# Altium PCB PCB1.PcbDoc
Units mil, origin at the board's own origin, x right, y up, seen from the top; angles counter-clockwise.
Board outline 2372.23 x 1584.83 mil, 2 copper layers (Top Layer, Bottom Layer); 37 components, 27 nets, 141 pads, 30 vias.
Unrouted connection lines stored in the file: 20.
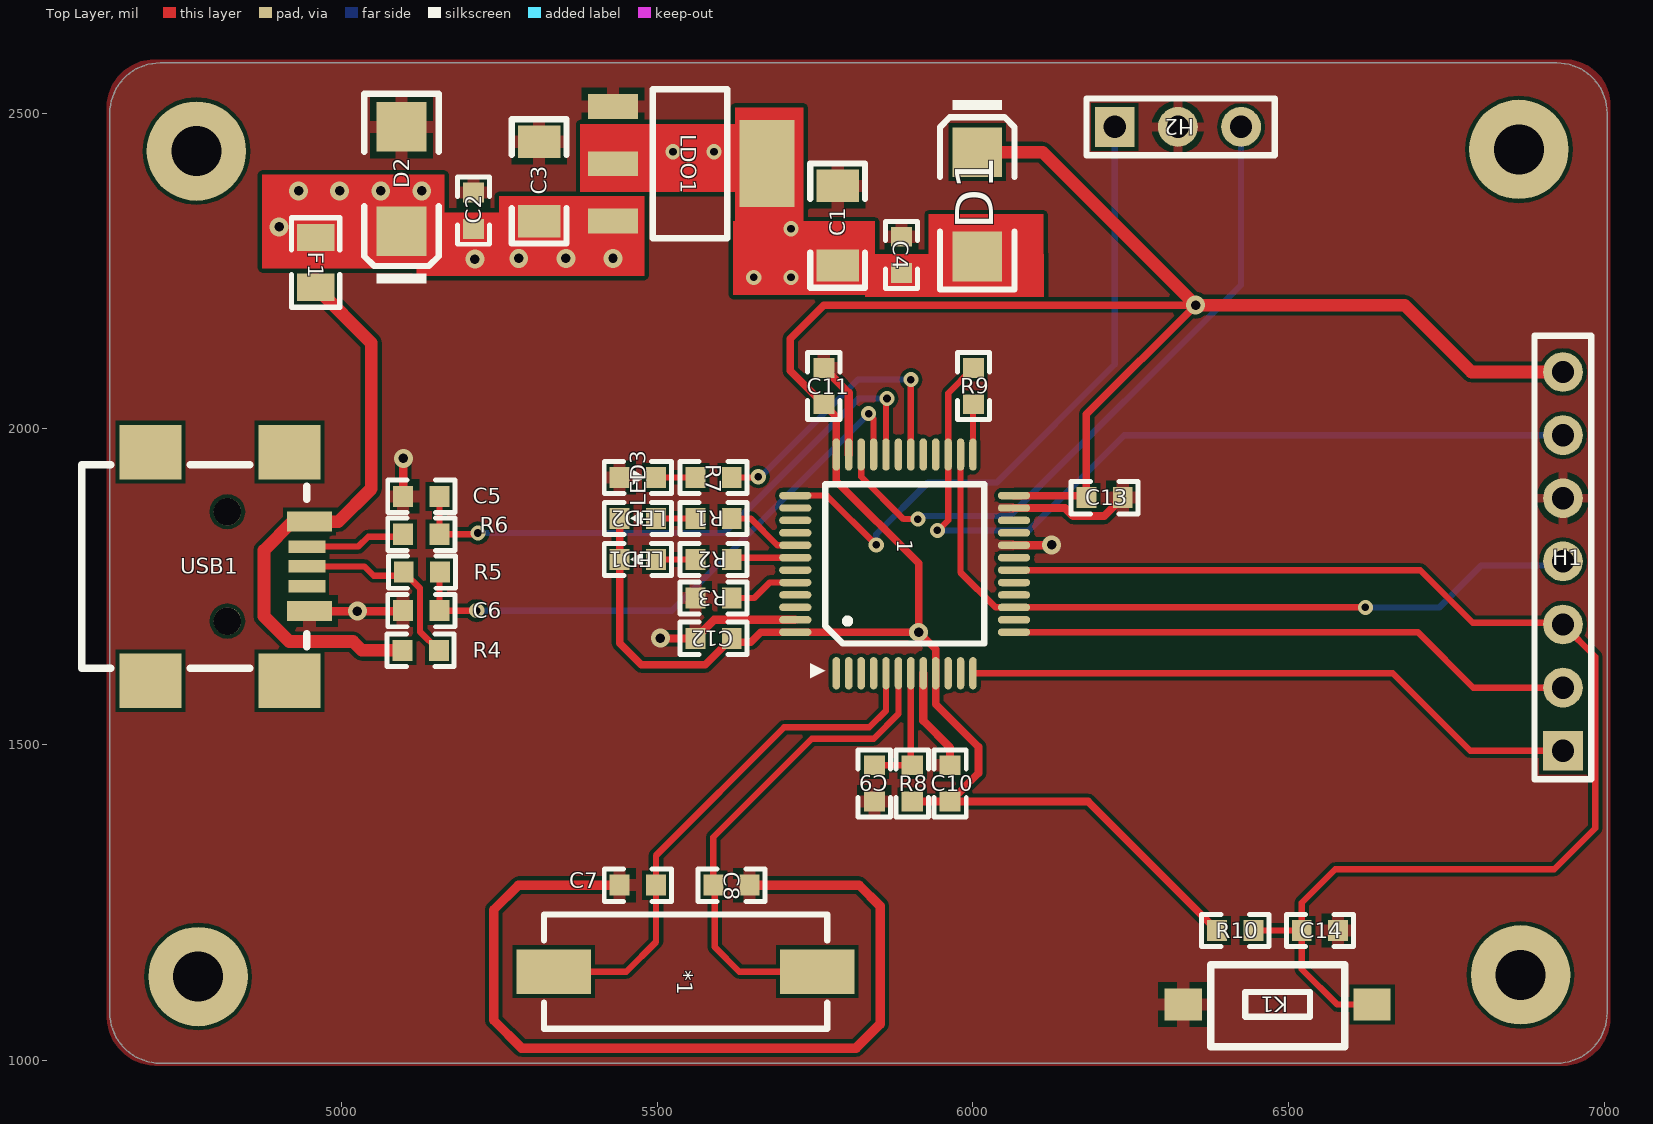
[diagram p0: Top Layer view]
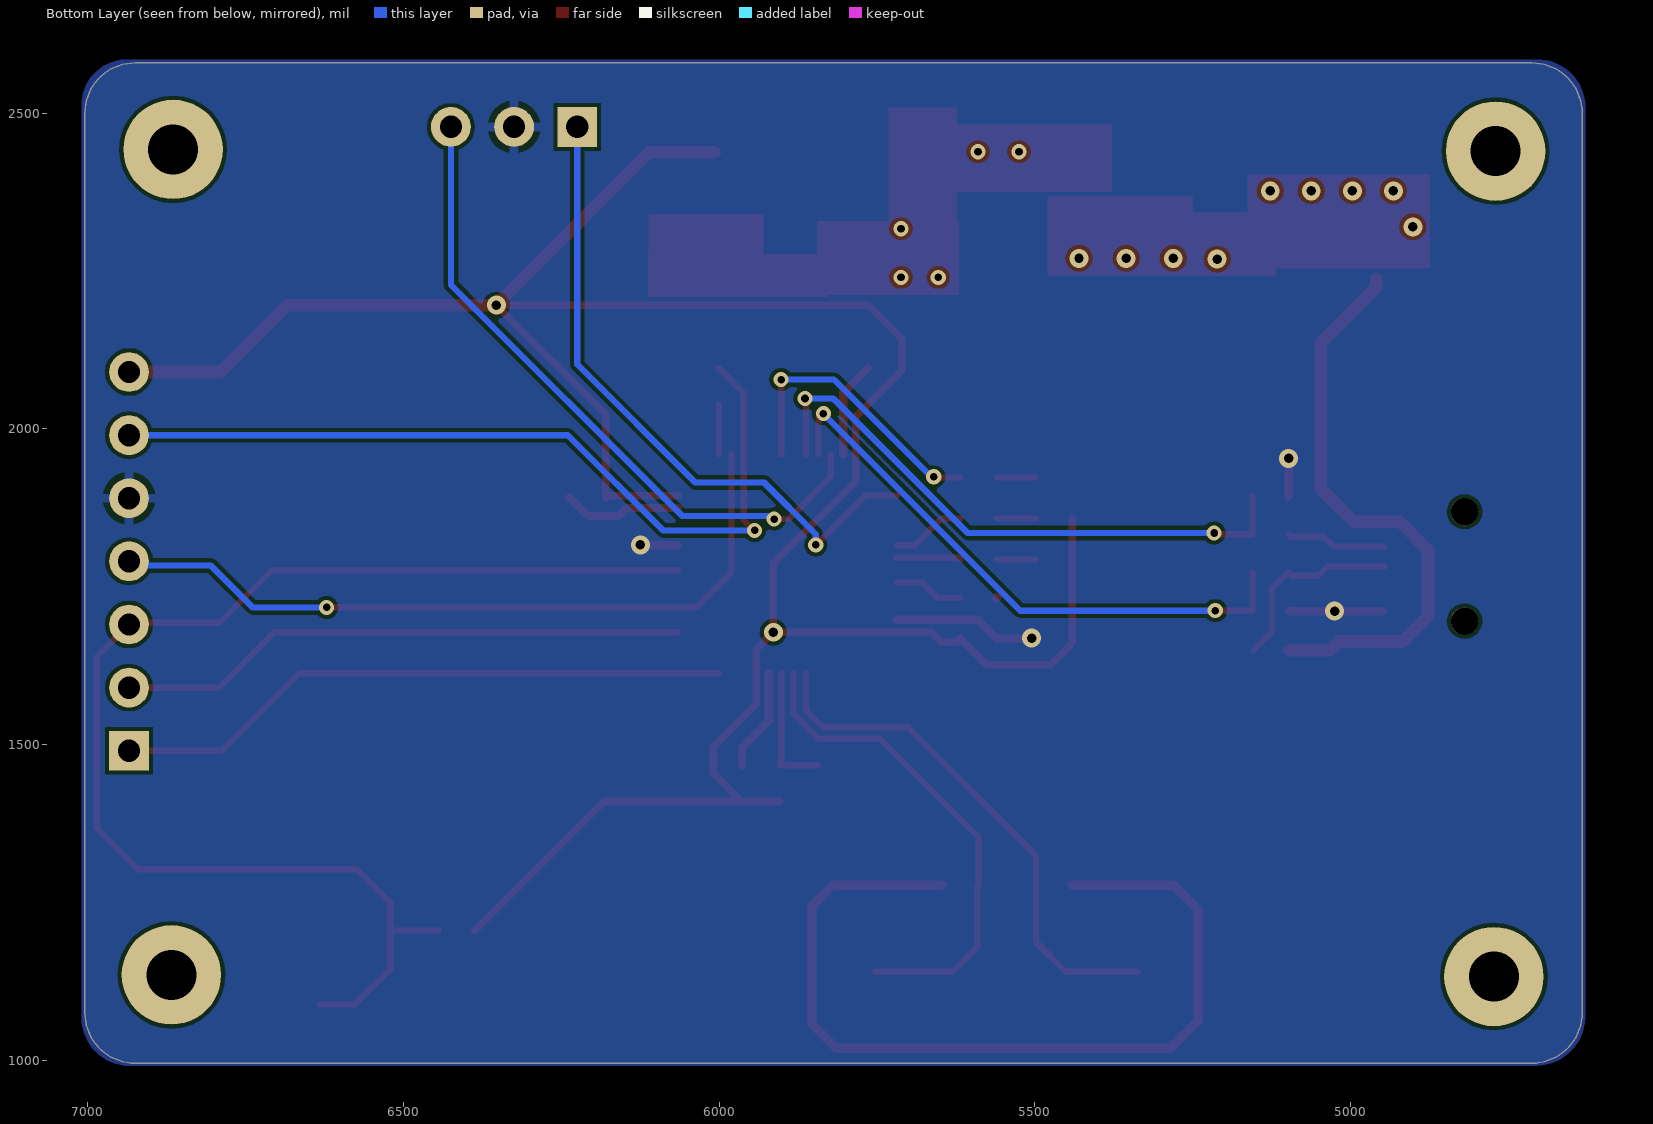
[diagram p1: Bottom Layer view, seen from below]
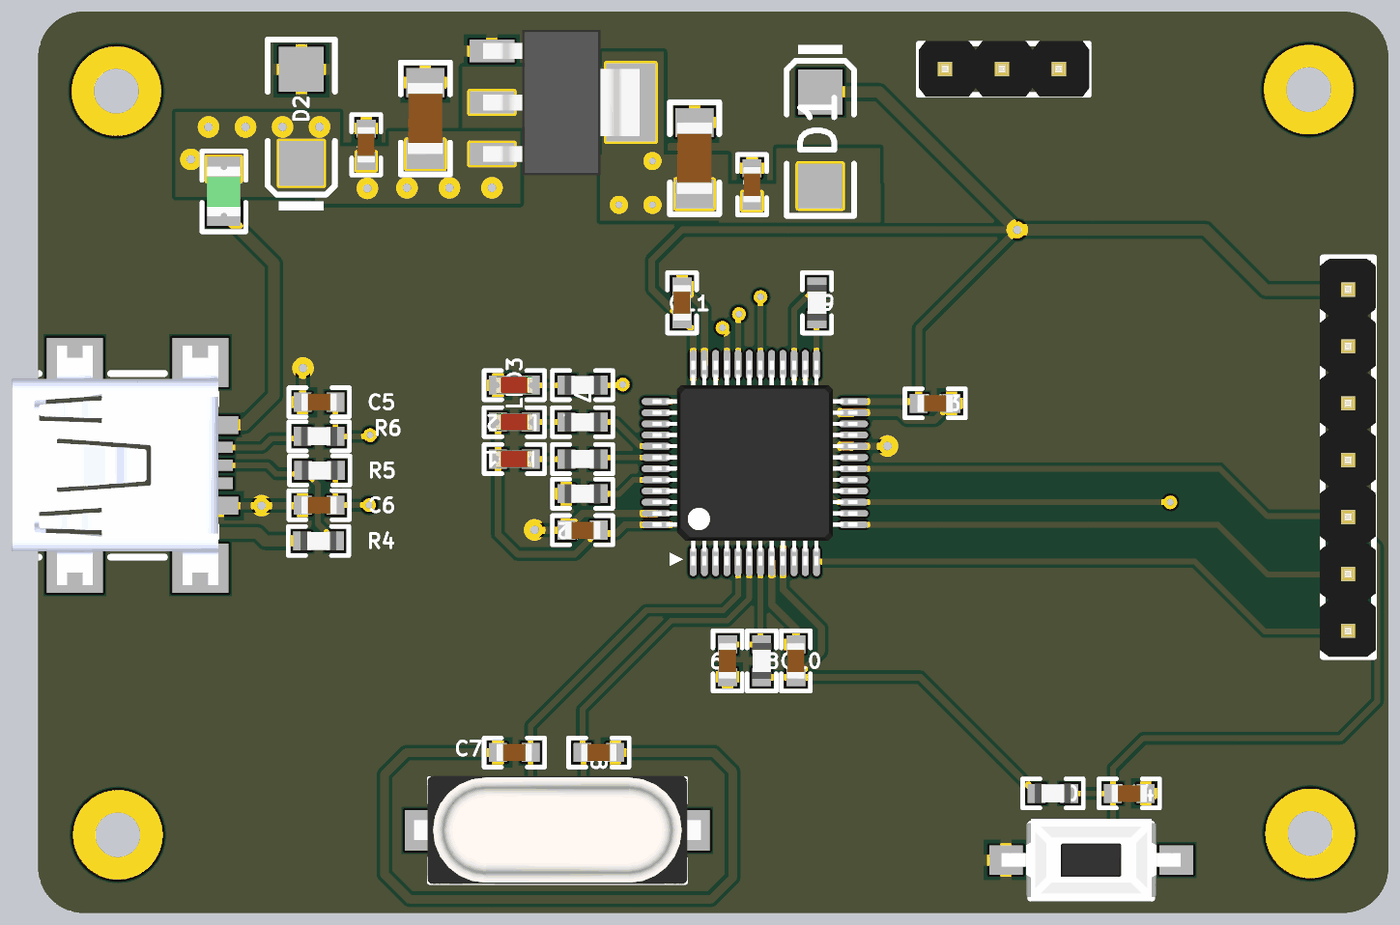
[diagram p2: 3D render of the assembled board from above, using the file's embedded part models]

## Layer stack, top to bottom
Top Solder: solder mask 0.4, Solder Resist, Dk 3.5
Top Layer: signal copper 1.4
Dielectric 1: dielectric 12.6, FR-4, Dk 4.8
Bottom Layer: signal copper 1.4
Bottom Solder: solder mask 0.4, Solder Resist, Dk 3.5

## Board outline
4632.78,1074.8 ccw(c4712.6,1074.8) 4712.6,994.99 6925.2,994.99 ccw(c6925.2,1074.8) 7005.02,1074.8 7005.02,2500 ccw(c6925.2,2500) 6925.2,2579.82 4712.6,2579.82 ccw(c4712.6,2500) 4632.78,2500

## Design rules (kind name [scope] priority, off if disabled: settings)
Clearance [All] p1: gap=6 ignorepadtopadclearanceinfootprint=TRUE
PlaneClearance [All] p1: clearance=8
PlaneConnect [All] p1: planeconnectstyle=Relief reliefexpansion=10 reliefentries=4 reliefconductorwidth=6 reliefairgap=8
PolygonConnect [All] p1: thpad.connectstyle=Relief thpad.reliefconductorwidth=15 thpad.reliefentries=4 thpad.polygonreliefangle="90 Angle" thpad.airgapwidth=10 smdpad.connectstyle=Relief smdpad.reliefconductorwidth=20 smdpad.reliefentries=4 smdpad.polygonreliefangle="90 Angle" smdpad.airgapwidth=10 via.connectstyle=Direct via.reliefconductorwidth=10 via.reliefentries=4 via.polygonreliefangle="90 Angle" via.airgapwidth=10
RoutingVias POWER_Vias [InNetClass('POWER')] p1: holewidth=15 width=30 viastyle="Through Hole" minholewidth=15 minwidth=30 maxholewidth=50 maxwidth=100
RoutingVias PIN_Vias [All] p2: holewidth=12 width=24 viastyle="Through Hole" minholewidth=12 minwidth=24 maxholewidth=12 maxwidth=24
SolderMaskExpansion [All] p1: expansion=4
UnRoutedNet [All] p1: checkbadconnections=TRUE
Width PIN_Width [InNetClass('PIN')] p1: maxlimit=10 minlimit=6 preferedwidth=6
Width POWER_Width [InNetClass('POWER')] p2: maxlimit=80 minlimit=12 preferedwidth=15
27 further rules are at their usual default settings.

## Classes and differential pairs
net class USB: USB_D+ USB_D-
net class POWER: 3V3 GND NetC2_2 VCC
net class PIN: Net1_25 Net1_30 Net1_32 Net1_33 Net1_41 Net1_42 Net1_44 NetLED1_2 NetLED2_2 NetLED3_1 NSRT OSC_IN OSC_OUT SWCLK SWDIO TGT_NREST TGT_RX TGT_SWCLK TGT_SWDIO TGT_TX USB_D+ USB_D-

## Components (designator, comment, footprint, x,y, rotation, side; value= is the part's Value field where it differs from the comment)
1 "STM32F103CBT6" LQFP_48_7X7 5892,1786 r0 top
*1 "8M" XTAL_SMD_49S 5545,1140 r180 top
C1 "106" C_SOP_1206 5786,2321.87 r270 top
C2 "104" C_SOP_0603 5209,2345.54 r270 top
C3 "106" C_SOP_1206 5313,2391.87 r270 top
C4 "104" C_SOP_0603 5887,2275.54 r270 top
C5 "18pf" C_SOP_0603 5126.26,1893 r0 top
C6 "18pf" C_SOP_0603 5126.26,1712 r0 top
C7 "22pf" C_SOP_0603 5469.26,1277 r0 top
C8 "22pf" C_SOP_0603 5617.74,1277 r180 top
C9 "104" C_SOP_0603 5844,1438.26 r270 top
C10 "104" C_SOP_0603 5964,1438.26 r270 top
C11 "104" C_SOP_0603 5764,2067.74 r270 top
C12 "104" C_SOP_0603 5589.26,1668 r0 top
C13 "104" C_SOP_0603 6208.74,1891 r180 top
C14 "104" C_SOP_0603 6549.91,1205.13 r0 top
D1 "1N4007" LC-SMA(DO-214AC)_S5 6007,2355.68 r270 top
D2 "1N4007" LC-SMA(DO-214AC)_S5 5095,2395.68 r90 top
F1 "6V/1A" Fuse_0805 4959,2263.65 r90 top
H1 "Header 7H" "Header 2.54X7" 6935,1790 r90 top
H2 "Header_1*3" "Header 2.54X3" 6325,2478.35 r0 top
K1 "KEY" SW_PB_3X6 6483,1088 r180 top
LDO1 "LDO-3.3-AMS1117" SOT223_3 5552,2420 r180 top
LED1 "LED" LED_0603_R 5469.26,1793 r0 top
LED2 "LED" LED_0603_R 5469.26,1858 r0 top
LED3 "LED" LED_0603_R 5469.26,1923 r180 top
R1 "1K" R_SMD_0603 5589.26,1858 r180 top
R2 "1K" R_SMD_0603 5589.26,1793 r180 top
R3 "100K" R_SMD_0603 5589.26,1732 r180 top
R4 "10K" R_SMD_0603 5125.26,1649 r0 top
R5 "33R" R_SMD_0603 5127.26,1773 r180 top
R6 "33R" R_SMD_0603 5126.26,1833 r180 top
R7 "470R" R_SMD_0603 5589.26,1923 r180 top
R8 "100K" R_SMD_0603 5904,1438.26 r270 top
R9 "100R" R_SMD_0603 6001,2067.74 r90 top
R10 "10K" R_SMD_0603 6415.74,1205.13 r180 top
USB1 "USB_AB" USB_MINI_SMD 4823,1782 r180 top

## Footprints (in the part's own frame and the unit in brackets; to place one, negate y for a bottom-side part, rotate by r counter-clockwise, add the part's x,y. Pads: shape width x height; smd on the part's side, far side on the other; paste and mask are expansions set on the pad)
C_SOP_0603 [mm]
  rect 0.8x0.85 smd: 1(-0.73,0) 2(0.73,0)
  silkscreen extent -1.35,-0.65 1.35,0.65, body extent -0.8,-0.4 0.8,0.4, height 0.6
C_SOP_1206 [mm]
  rect 1.3x1.7 smd: 1(-1.6,0) 2(1.6,0)
  silkscreen extent -2.5,-1.1 2.5,1.1, body extent -1.6,-0.8 1.6,0.8, height 0.95
Fuse_0805 [mm]
  rect 1.1x1.5 smd: 1(-1,0) 2(1,0)
  silkscreen extent -1.8,-0.98 1.8,0.98, body extent -1.1,-0.75 1.1,0.75, height 1.24
"Header 2.54X3" [mm]
  rect 1.6x1.6 hole 0.9: 1(-2.54,0)
  round 1.6 hole 0.9: 2(0,0) 3(2.54,0)
  silkscreen extent -3.68,-1.14 3.9,1.14, body extent -3.68,-1.23 3.94,1.27, height 8.3
"Header 2.54X7" [mm]
  rect 1.6x1.6 hole 0.9: 1(-7.62,0)
  round 1.6 hole 0.9: 2(-5.08,0) 3(-2.54,0) 4(0,0) 5(2.54,0) 6(5.08,0) 7(7.62,0)
  silkscreen extent -8.76,-1.14 9.08,1.14, body extent -8.76,-1.23 9.02,1.27, height 8.3
LC-SMA(DO-214AC)_S5 [mm]
  rect 2x2 smd: 1(2.1,0) 2(-2.1,0)
  silkscreen extent -4.2,-1.5 3.43,1.5
LED_0603_R [mm]
  rect 0.8x0.85 smd: 1(-0.73,0) 2(0.73,0)
  silkscreen extent -1.35,-0.65 1.35,0.65, body extent -0.81,-0.4 0.81,0.4, height 0.6
LQFP_48_7X7 [mm]
  oval 0.3x1.3 smd: 1(-2.75,-4.4) 2(-2.25,-4.4) 3(-1.75,-4.4) 4(-1.25,-4.4) 5(-0.75,-4.4) 6(-0.25,-4.4) 7(0.25,-4.4) 8(0.75,-4.4) 9(1.25,-4.4) 10(1.75,-4.4) 11(2.25,-4.4) 12(2.75,-4.4) 25(2.75,4.4) 26(2.25,4.4) 27(1.75,4.4) 28(1.25,4.4) 29(0.75,4.4) 30(0.25,4.4) 31(-0.25,4.4) 32(-0.75,4.4) 33(-1.25,4.4) 34(-1.75,4.4) 35(-2.25,4.4) 36(-2.75,4.4)
  oval 1.3x0.3 smd: 13(4.4,-2.75) 14(4.4,-2.25) 15(4.4,-1.75) 16(4.4,-1.25) 17(4.4,-0.75) 18(4.4,-0.25) 19(4.4,0.25) 20(4.4,0.75) 21(4.4,1.25) 22(4.4,1.75) 23(4.4,2.25) 24(4.4,2.75) 37(-4.4,2.75) 38(-4.4,2.25) 39(-4.4,1.75) 40(-4.4,1.25) 41(-4.4,0.75) 42(-4.4,0.25) 43(-4.4,-0.25) 44(-4.4,-0.75) 45(-4.4,-1.25) 46(-4.4,-1.75) 47(-4.4,-2.25) 48(-4.4,-2.75)
  silkscreen extent -3.8,-4.6 3.2,3.2, body extent -4.57,-4.57 4.57,4.57, height 1.62
R_SMD_0603 [mm]
  rect 0.8x0.85 smd: 1(-0.73,0) 2(0.73,0)
  silkscreen extent -1.35,-0.65 1.35,0.65, body extent -0.8,-0.43 0.8,0.43, height 0.48
SOT223_3 [mm]
  rect 2x1 smd: 1(3.1,-2.3) 2(3.1,0) 3(3.1,2.3)
  rect 2.2x3.5 smd: 4(-3.1,0)
  silkscreen extent -1.5,-3 1.5,3, body extent -3.5,-3.25 3.5,3.25, height 1.64
SW_PB_3X6 [mm]
  rect 1.5x1.3 smd: 1(-3.8,0) 2(3.8,0)
  silkscreen extent -2.7,-1.6 2.7,1.7, body extent -4,-1.85 4,1.85, height 2.6
USB_MINI_SMD [mm]
  rect 1.8x0.8 smd: 1(-3.2,-1.8) 5(-3.2,1.8)
  rect 1.5x0.5 smd: 2(-3.1,-0.8) 3(-3.1,0) 4(-3.1,0.8)
  round 1.1 hole 1.1 unplated: H1(0.1,2.2) H2(0.1,-2.2)
  rect 2.5x2.2 smd: H3(-2.4,-4.6) H4(-2.4,4.6) H5(3.2,-4.6) H6(3.2,4.6)
  silkscreen extent -3.1,-4.1 5.97,4.1, body extent -3.2,-5.35 6,5.35, height 3.95
XTAL_SMD_49S [mm]
  rect 3x1.8 smd: 1(-5.3,0) 2(5.3,0)
  silkscreen extent -5.7,-2.3 5.7,2.3, body extent -6.4,-2.43 6.4,2.4, height 4.4

## Part data
*1: library part XTAL_SMD
C1 C2 C3 C4 C5 C6 C7 C8 C9 C10 C11 C12 C13 C14: library part C_SMD
F1: library part FUSE
H1: "Header, 7-Pin, Right Angle", LatestRevisionDate=17-Jul-2002, LatestRevisionNote="Re-released for DXP Platform.", Publisher="Altium Limited"
R1 R2 R3 R4 R5 R6 R7 R8 R9 R10: library part R_SMD

## Free pads (board coordinates)
  round 157.48 hole 78.74: ""(4770,2440) ""(4772.6,1132.2) ""(6865.2,2442.6) ""(6867.8,1134.8)

## Via types
v1: diameter 30, hole 15, Top Layer to Bottom Layer, 15 vias
v2: diameter 24, hole 12, Top Layer to Bottom Layer, 15 vias

## Nets (pads, with @x,y where several pads share a name; then routed paths per layer and width w, separated by ;. In a path a pad name is that pad's centre, name@x,y a point inside that pad or via, vN(x,y) a via of type N, cw(c..) or ccw(c..) an arc to the next point about the centre after c; other vN are vias at no path point)
3V3: 1.9 1.24 1.36 1.48 C10.2 C11.2 C12.2 C13.2 D1.2 H1.7 LED1.1 LED2.1 R8.2 R10.2 | length 4384.2
  Top Layer w12: LED2.1 LED1.1 5440.52,1660.48 5475,1626 5576,1626 C12.2 5624,1662 5648,1662 5663.73,1677.73 1.48 v1(5914.27,1677.73) ; R8.2 C10.2 ; 1.24 6176.73,1894.27 C13.2 6180,2023 v1(6353,2196) 5764,2196 5711,2143 5711,2092 C11.2 5783.73,2019.27 1.36 5783.73,1917.27 5914.27,1786.73 v1(5914.27,1677.73) ; R10.2 6182.61,1409.52 C10.2 ; v1(5914.27,1677.73) 5941.21,1650.79 1.9 5941.21,1563.79 6009,1496 6009,1454.52 C10.2
  Top Layer w20: D1.2 6110.65,2438.35 v1(6353,2196) 6684,2196 6790,2090 H1.7
GND: 1.8 1.20 1.23 1.35 1.47 C1.1 C2.1 C3.1 C4.1 C5.1 C6.1 C7.1 C8.1 C9.2 C10.1 C11.1 C12.1 C13.1 C14.2 D2.1 H1.5 H2.2 K1.2 LDO1.1 LED3.2 R3.2 USB1.5 | length 2445.6
  Top Layer w13: USB1.5 v1(5025,1711.13) 5096.65,1711.13 C6.1 ; C5.1 5097.52,1952.52 v1(5098,1953) ; v1(5505,1668.44) 5505.44,1668 C12.1 5589.94,1697.42 1.47 ; C11.1 5803.42,2057.06 1.35 ; 1.8 5921.53,1537.47 5964,1495 C10.1 ; 1.20 6124.53,1815.53 v1(6125,1816) ; 1.23 6146.26,1874.58 6159.07,1861.77 6208.25,1861.77 C13.1
  Top Layer w15: C7.1 5280,1277 5241,1238 5241,1063 5285,1019 5815,1019 5853,1057 5853,1244 5820,1277 C8.1
Net1_25: 1.25 R9.1 | length 80.1
  Top Layer w10: 1.25 6000.27,2038.27 R9.1
Net1_30: 1.30 R7.1 | length 467
  Top Layer w10: R7.1 5659,1923 v2(5660,1924) ; 1.30 5901.84,2077.84 v2(5902,2078)
  Bottom Layer w10: v2(5660,1924) 5664,1924 5818,2078 v2(5902,2078)
Net1_32: 1.32 C5.2 R6.1 | length 947.5
  Top Layer w10: C5.2 R6.1 5214,1833 v2(5216,1835) ; 1.32 5862.47,2046.47 v2(5864,2048)
  Bottom Layer w10: v2(5216,1835) 5606,1835 5819,2048 v2(5864,2048)
Net1_33: 1.33 C6.2 R5.1 | length 938.6
  Top Layer w10: R5.1 5155,1772 C6.2 v2(5214,1712) ; v2(5835,2024) 5842.79,2016.21 1.33
  Bottom Layer w10: v2(5214,1712) 5523,1712 v2(5835,2024)
Net1_41: 1.41 R1.1 | length 118.4
  Top Layer w10: R1.1 5648,1858 5690.47,1815.53 1.41
Net1_42: 1.42 R2.1 | length 101.9
  Top Layer w10: R2.1 5620.84,1795.84 1.42
Net1_44: 1.44 R3.1 | length 110.9
  Top Layer w10: R3.1 5654,1732 5678.47,1756.47 1.44
NetC1_2: C1.2 C4.2 D1.1 LDO1.2 LDO1.4 | length 2.8
  Top Layer w20: v2@5587.94,2439 v2@5589.94,2437
  other v2: 5653,2240 5712,2240 5712,2317 5525,2439 5589.94,2439
NetC2_2: C2.2 C3.2 D2.2 F1.2 LDO1.3 | length 26.6
  Top Layer w12: v1@4926,2371 4926,2370 v1@4932,2364 ; C3.2@5300.91,2316.8 C3.2
  other v1: 5211,2269 5280.65,2270 5355.3,2270 5429.95,2270 4901,2320 4932,2377 4997,2377 5062,2377 5127,2377
NetLED1_2: LED1.2 R2.2 | length 62.5
  Top Layer w10: LED1.2 R2.2
NetLED2_2: LED2.2 R1.2 | length 62.5
  Top Layer w10: LED2.2 R1.2
NetLED3_1: LED3.1 R7.2 | length 62.5
  Top Layer w10: LED3.1 R7.2
NSRT: 1.7 C9.1 R8.1 | length 206.7
  Top Layer w10: C9.1 R8.1 5901.84,1469.16 1.7
OSC_IN: 1.5 *1.2 C7.2 | length 837
  Top Layer w10: *1.2 5451,1140 5498,1187 C7.2 5498,1324 5701,1527 5836,1527 5862.47,1553.47 1.5
OSC_OUT: 1.6 *1.1 C8.2 | length 792.3
  Top Layer w10: *1.1 5630,1140 5591,1179 5591,1275 C8.2 5589,1353 5745,1509 5843,1509 5882.16,1548.16 1.6
SWCLK: 1.37 H2.1 | length 1043.4
  Top Layer w10: 1.37 5768.73,1894.27 v2(5847,1816)
  Bottom Layer w10: v2(5847,1816) 5847,1833 5929,1915 6038,1915 6225,2102 H2.1
SWDIO: 1.34 H2.3 | length 1068.8
  Top Layer w10: 1.34 5823.1,1924.12 5890.22,1857 v2(5913,1857)
  Bottom Layer w10: v2(5913,1857) 5918,1862 6059,1862 6425,2228 H2.3
TGT_NREST: 1.18 C14.1 H1.3 K1.1 R10.1 | length 2079.7
  Top Layer w10: 1.18 6708.84,1776.16 6792,1693 6932,1693 H1.3 6986,1639 6986,1367 6921,1302 6574,1302 6521.17,1249.17 C14.1 ; R10.1 C14.1 ; K1.1 6577.17,1088 6521.17,1144 C14.1
TGT_RX: 1.12 H1.1 | length 985.6
  Top Layer w10: 1.12 6665.23,1612.77 6788,1490 H1.1
TGT_SWCLK: 1.15 1.26 H1.4 | length 1194.4
  Top Layer w10: 1.26 5980.58,1772.42 6035.9,1717.1 1.15 6621.9,1717.1 v2(6622,1717)
  Bottom Layer w10: v2(6622,1717) 6739,1717 6805.5,1783.5 6928.5,1783.5 H1.4
TGT_SWDIO: 1.27 H1.6 R9.2 | length 1336.6
  Top Layer w10: v2(5944,1839) 5944,1838 5960.9,1854.9 1.27 5960.9,2056.38 R9.2
  Bottom Layer w10: v2(5944,1839) 6089,1839 6240,1990 H1.6
TGT_TX: 1.13 H1.2 | length 906.1
  Top Layer w10: 1.13 6705.27,1677.73 6793,1590 H1.2
USB_D+: R4.2 R5.2 USB1.3 | length 309.2
  Top Layer w10: USB1.3 5036,1782 5051,1767 5092.52,1767 R5.2 5124.27,1747.25 5124.27,1678.73 R4.2
USB_D-: R6.2 USB1.2 | length 160.6
  Top Layer w10: USB1.2 5026.5,1813.5 5042,1829 5093.52,1829 R6.2
VCC: F1.1 R4.1 USB1.1 | length 926.2
  Top Layer w20: F1.1@4959,2238 F1.1 5047,2136.28 5047,1905 4994.87,1852.87 USB1.1 4922.42,1852.87 4877,1807.45 4877,1703 4917,1663 5018,1663 5032,1649 R4.1
pads on no net: 1.1 1.2 1.3 1.4 1.10 1.11 1.14 1.16 1.17 1.19 1.21 1.22 1.28 1.29 1.31 1.38 1.39 1.40 1.43 1.45 1.46 USB1.4 USB1.H1 USB1.H2 USB1.H3 USB1.H4 USB1.H5 USB1.H6

## Polygon pours and split planes (outlines as drawn)
GND on Bottom Layer (solid, remove dead copper, pour order 14): 4627.99,1066.73 cw(c4708,1071) 4627.98,1075.13 4627.98,2509 cw(c4704,2509) 4704,2585.02 6942,2585.02 cw(c6942,2580) 6942.37,2585 cw(c6937,2512) 7010.2,2512 cw(c6937,2512) 7010.01,2506.82 7010.01,1067 cw(c6934,1067) 6934,990.99 4704,990.99 cw(c4704,996) 4703.73,990.99 cw(c4708,1071)
GND on Top Layer (solid, remove dead copper, pour order 18): 4627.99,1066.73 cw(c4708,1071) 4627.98,1075.13 4627.98,2509 cw(c4704,2509) 4704,2585.02 6942,2585.02 cw(c6942,2580) 6942.37,2585 cw(c6937,2512) 7010.2,2512 cw(c6937,2512) 7010.01,2506.82 7010.01,1067 cw(c6934,1067) 6934,990.99 4704,990.99 cw(c4704,996) 4703.73,990.99 cw(c4708,1071)

## Other copper
Top Layer:
  rectangle net NetC2_2: 5249,2242 5480,2369
  rectangle net NetC2_2: 5119,2242 5261,2343
  rectangle net NetC1_2: 5930,2247 6112,2340
  rectangle net NetC1_2: 5829,2209 6113,2277
  rectangle net NetC1_2: 5620,2212 5845,2328.88
  rectangle net NetC1_2: 5623,2278 5732,2509
  rectangle net NetC1_2: 5378,2375 5728,2483
  rectangle net NetC2_2: 4874,2254 5163,2403

## Silkscreen, mask and mechanical layers (free items; w line width, h text height)
Drill Drawing:
  lines w10: 4633,1067 4633,2509 cw(c4704,2509) 4704,2580 6942,2580 cw(c6937,2512) 7005,2507 7005,2505 ; 4633,1075 ccw(c4708,1071) 4704,996 6934,996 ccw(c6934,1067) 7005,1067 7005,2517 ; 6932,2580 6940,2580